# EAGLE board Amazing-All-Band-Receiver (EAGLE 7.2.0)

Size 45.72 x 27.94 mm. Coordinates in mm from the lower left corner, seen from the top.
Outline: 0,0 45.72,0 45.72,27.94 0,27.94 0,0
Copper layers (1*16): Top 0.035mm / dielectric 1.5mm / Bottom 0.035mm
Design rules "default": minimum track width 10mil, minimum drill 24mil, track to track 8mil, track to pad 8mil, pad to pad 8mil, via to via 8mil, smd to smd 8mil, copper to edge 40mil, drill to drill 8mil, minimum pad ring 10mil, minimum via ring 8mil, stop-mask expansion 4mil, vias tented up to drill 0mil, thermal gap 10mil
Net classes: 0 default: width 0.61 mm

## Footprints (pad centres in the part's own frame; a part is rotated, then mirrored left to right if it is on the bottom)
SPAD = drill 1 pad 1.778: 1 0,0
C050-020X036/V = drill 0.8: 1 0,-2.54; 2 0,2.54
C050-020X036 = drill 0.8: 1 -2.54,0; 2 2.54,0
E2,5-3 = drill 0.7 square: + 0,1.27 | drill 0.7: - 0,-1.27
DO34-7V = drill 0.8: A 0,-3.81; C 0,3.81
0202/7-V = drill 0.7: 1 0,-3.81; 2 0,3.81
0202/7 = drill 0.7: 1 0,3.81; 2 0,-3.81
POT = drill 1 pad 1.93: 1 -2.54,0; 2 0,0; 3 2.54,0
TO92-CBE = drill 0.7 pad 1.422: B 0,0; C 0,2.54; E 0,-2.54

## Placement (x,y rotation side)
ANT1  ANT  [SPAD]  5.08,22.86 0 top
C1  100p  [C050-020X036/V]  5.08,15.24 180 top
C2  10n  [C050-020X036]  12.7,5.08 180 top
C3  1n  [C050-020X036]  22.86,5.08 270 top
C4  10n  [C050-020X036]  27.94,12.7 180 top
C5  1n  [C050-020X036]  33.02,5.08 270 top
C6  1u  [E2,5-3]  40.64,8.89 0 top
D1  OA79  [DO34-7V]  7.62,8.89 0 top
EAR+  SPAD  [SPAD]  35.56,7.62 270 top
EAR-  SPAD  [SPAD]  35.56,2.54 90 top
GND  SPAD  [SPAD]  40.64,2.54 180 top
R1  10k  [0202/7-V]  5.08,6.35 0 top
R2  10M  [0202/7]  10.16,11.43 180 top
R3  10M  [0202/7-V]  19.05,10.16 270 top
R5  10M  [0202/7-V]  29.21,10.16 270 top
R6  100k  [0202/7-V]  35.56,13.97 0 top
R7  100k  [POT]  22.86,15.24 180 top
T1  BC547  [TO92-CBE]  17.78,5.08 0 top
T2  BC547  [TO92-CBE]  27.94,5.08 0 top
VCC  SPAD  [SPAD]  40.64,17.78 180 top

## Library data of the parts
ANT1 EAR+ EAR- GND VCC = pad
C1-C6 = c
D1 = d
R1-R3 R5-R7 = r
T1 T2 = t

## Nets
AC: C1.2 D1.C R1.2
ANT: ANT1.1 C1.1
DC: C2.2 D1.A R2.1
GND: C3.2 C5.2 C6.- EAR-.1 GND.1 R1.1 T1.E T2.E
I1: C2.1 R3.1 T1.B
I2: C4.1 R5.1 T2.B
O1: C3.1 R3.2 R7.3 T1.C
O2: C5.1 EAR+.1 R5.2 R6.1 T2.C
VCC: C6.+ R2.2 R6.2 R7.1 VCC.1
VO1: C4.2 R7.2

## Tracks (layer width: path | path; a pad name or v marks a point on that pad's centre or on a via)
AC  (2 unrouted)
ANT  (1 unrouted)
DC  (2 unrouted)
GND  (7 unrouted)
I1  (2 unrouted)
I2  (2 unrouted)
O1  (3 unrouted)
O2  (4 unrouted)
VCC  (4 unrouted)
VO1  (1 unrouted)